# Altium PCB MAGI'sMicroSD.PcbDoc
Units mm, origin at the board's own origin, x right, y up, seen from the top; angles counter-clockwise.
Board outline 152.4 x 101.6 mm, 2 copper layers (Top Layer, Bottom Layer); 9 components, 17 nets, 72 pads, 7 vias.
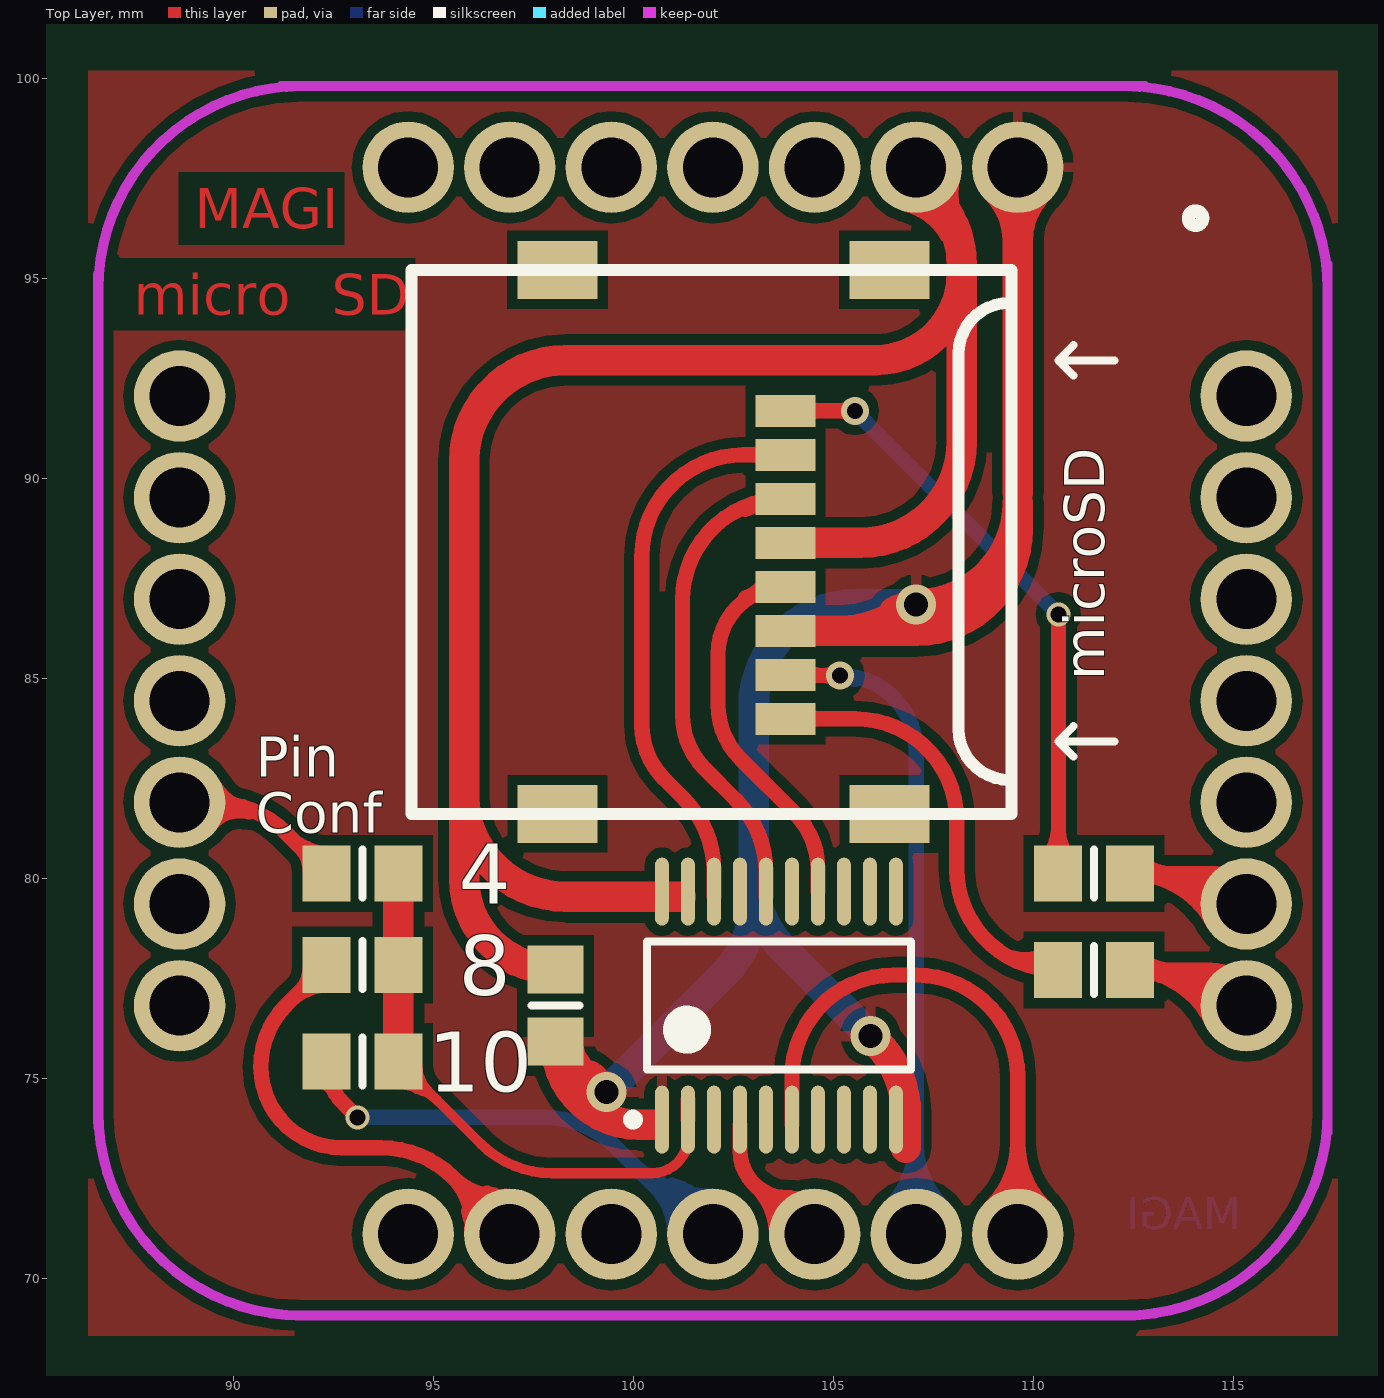
[diagram p0: Top Layer view]
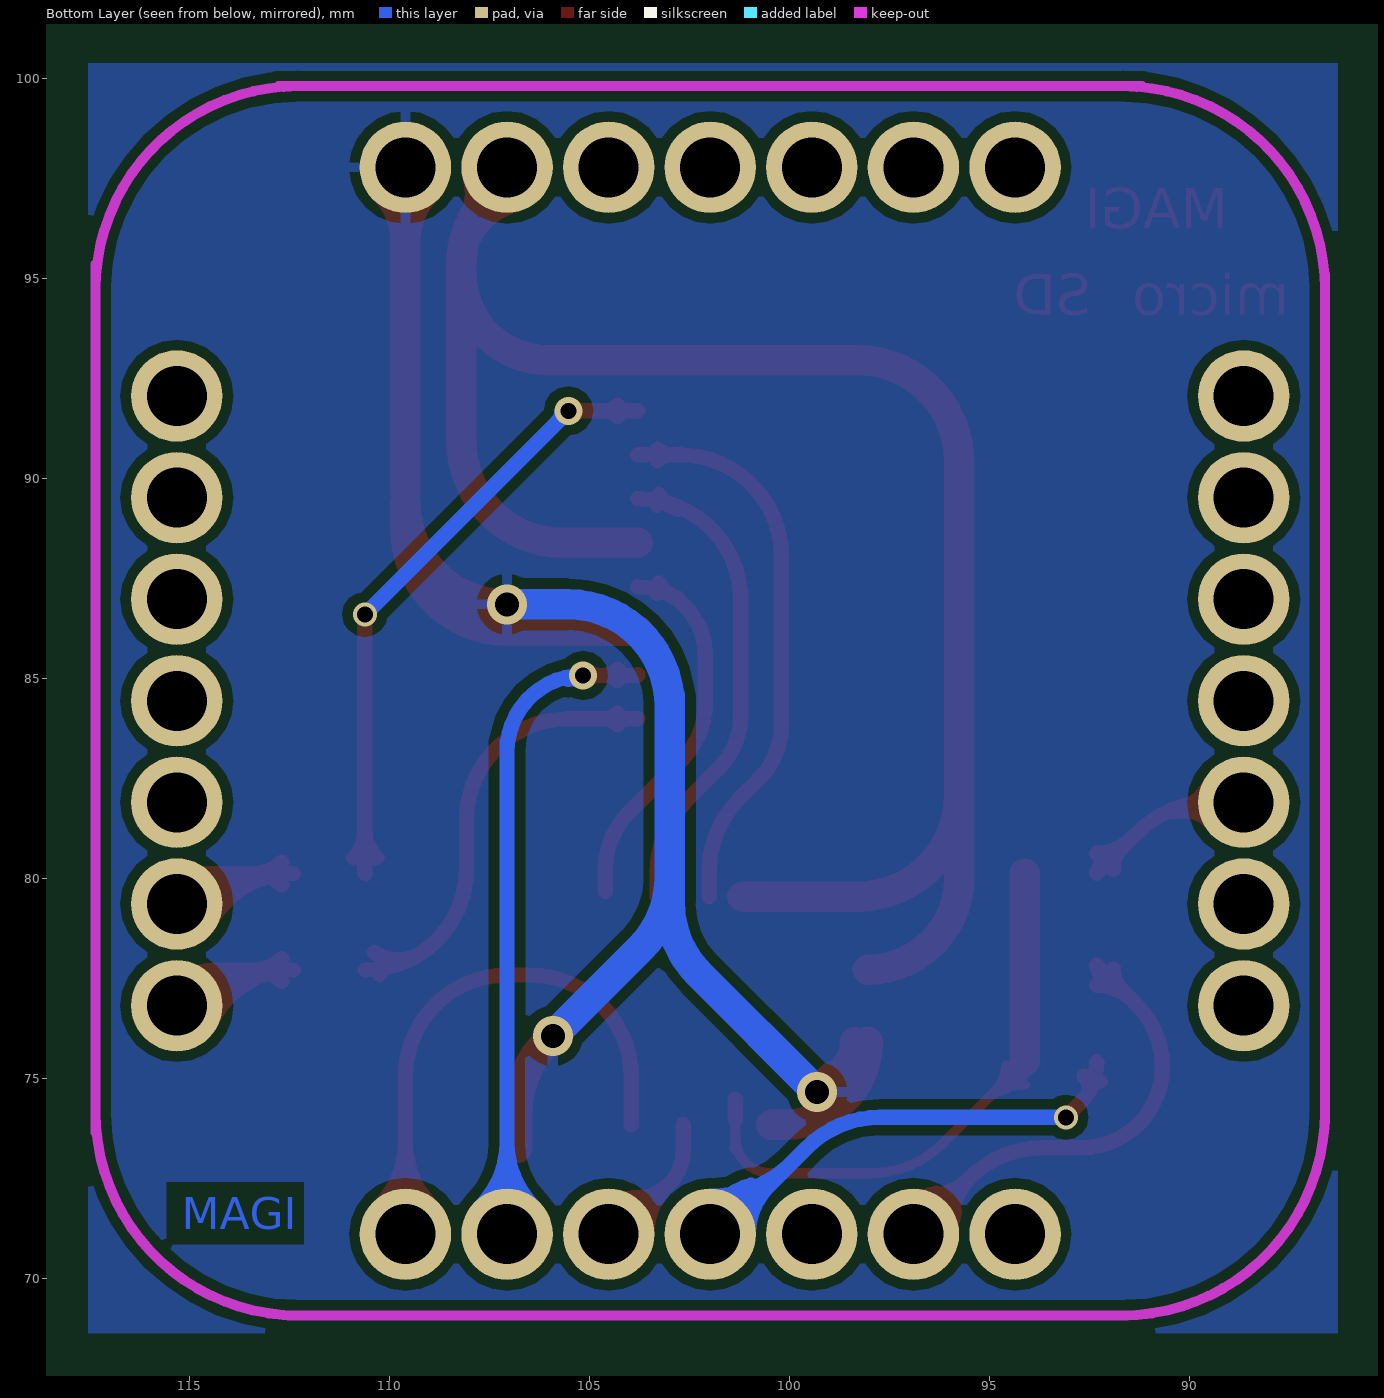
[diagram p1: Bottom Layer view, seen from below]

## Layer stack, top to bottom
Top Solder: solder mask 0.0102, Solder Resist, Dk 3.5
Top Layer: signal copper 0.0356
Dielectric 1: dielectric 0.32, FR-4, Dk 4.8
Bottom Layer: signal copper 0.0356
Bottom Solder: solder mask 0.0102, Solder Resist, Dk 3.5

## Board outline
25.4,25.4 177.8,25.4 177.8,127 25.4,127

## Design rules (kind name [scope] priority, off if disabled: settings)
Clearance [All] p1: gap=0.254
ComponentClearance [All] p1 off: gap=0.254 collisioncheckmode=3 verticalgap=0.254 showdistances=FALSE
PolygonConnect [All] p1: connectstyle=Relief reliefconductorwidth=0.254 reliefentries=4 polygonreliefangle="90 Angle" airgapwidth=0.254
RoutingVias [All] p1: holewidth=0.711 width=1.27 viastyle="Through Hole" minholewidth=0.711 minwidth=1.27 maxholewidth=0.711 maxwidth=1.27
SolderMaskExpansion [All] p1: expansion=0.102
Width [All] p1: maxlimit=2.54 minlimit=0.254 preferedwidth=0.762
28 further rules are at their usual default settings.

## Classes and differential pairs
component class MAGI'sMicroSD: C8 J1 J2 U1

## Components (designator, comment, footprint, x,y, rotation, side; value= is the part's Value field where it differs from the comment)
C8 "SANYO" 6-0805_N 98.044,76.835 r270 top
J1 "MAGI-M8" MAGI-M8 101.981,84.455 r0 top
J2 "MicroSD" MICROSD 101.346,85.979 r270 top
U1 "SN74LVC244A" SN74LVC244APWRG 103.632,76.835 r90 top
? "Comment" 6-0805_N 111.506,77.724 r0 top
? "Comment" 6-0805_N 111.506,80.137 r180 top
? "Comment" 6-0805_N 93.218,80.137 r0 top
? "Comment" 6-0805_N 93.218,77.851 r0 top
? "Comment" 6-0805_N 93.218,75.438 r0 top

## Footprints (in the part's own frame and the unit in brackets; to place one, negate y for a bottom-side part, rotate by r counter-clockwise, add the part's x,y. Pads: shape width x height; smd on the part's side, far side on the other; paste and mask are expansions set on the pad)
6-0805_N [mm] "Chip Resistor, Body 2.0x1.2mm, IPC Medium Density"
  rect 1.2x1.4 smd: 1(-0.9,0) 2(0.9,0)
  silkscreen extent 0,-0.6 0,0.6, body extent -1.07,-0.7 1.07,0.7, height 0.7
MAGI-M8 [mil]
  round 90 hole 59.06: 1(300,525) 2(200,525) 3(100,525) 4(0,525) 5(-100,525) 6(-200,525) 7(-300,525) 8(-525,300) 9(-525,200) 10(-525,100) 11(-525,0) 12(-525,-100) 13(-525,-200) 14(-525,-300) 15(-300,-525) 16(-200,-525) 17(-100,-525) 18(0,-525) 19(100,-525) 20(200,-525) 21(300,-525) 22(525,-300) 23(525,-200) 24(525,-100) 25(525,0) 26(525,100) 27(525,200) 28(525,300)
  Keep-Out Layer lines w10: -605,-415 -605,290 -605,420 ; -605,-405 ccw(c-405,-405) -405,-605 ; -605,405 cw(c-405,405) -405,605 ; -425,605 425,605 ; -410,-605 415,-605 ; 405,-605 ccw(c405,-405) 605,-405 ; 405,605 cw(c405,405) 605,405 ; 605,-425 605,430
MICROSD [mm]
  rect 1.45x2 smd: 0(-9.25,5.05) 0(-9.25,-3.25) 0(4.35,5.05) 0(4.35,-3.25)
  rect 0.8x1.5 smd: 1(-5.725,2.45) 2(-4.625,2.45) 3(-3.525,2.45) 4(-2.425,2.45) 5(-1.325,2.45) 6(-0.225,2.45) 7(0.875,2.45) 8(1.975,2.45)
  silkscreen extent -9.25,-6.9 4.35,8.1
SN74LVC244APWRG [mm]
  oval 1.7x0.35 smd: 1(-2.85,2.925) 2(-2.85,2.275) 3(-2.85,1.625) 4(-2.85,0.975) 5(-2.85,0.325) 6(-2.85,-0.325) 7(-2.85,-0.975) 8(-2.85,-1.625) 9(-2.85,-2.275) 10(-2.85,-2.925) 11(2.85,-2.925) 12(2.85,-2.275) 13(2.85,-1.625) 14(2.85,-0.975) 15(2.85,-0.325) 16(2.85,0.325) 17(2.85,0.975) 18(2.85,1.625) 19(2.85,2.275) 20(2.85,2.925)
  silkscreen extent -2.97,-3.3 1.6,3.77, body extent -2.25,-3.3 2.25,3.3, height 1.2

## Part data
C8: library part CAP_1, "Capacitor"
U1: library part 74LVC244

## Via types
v1: diameter 1, hole 0.6, Top Layer to Bottom Layer, 3 vias
v2: diameter 0.6, hole 0.4, Top Layer to Bottom Layer, 2 vias
v3: diameter 0.7, hole 0.4, Top Layer to Bottom Layer, 2 vias

## Nets (pads, with @x,y where several pads share a name; then routed paths per layer and width w, separated by ;. In a path a pad name is that pad's centre, name@x,y a point inside that pad or via, vN(x,y) a via of type N, cw(c..) or ccw(c..) an arc to the next point about the centre after c; other vN are vias at no path point)
4: ?.1@92.318,80.137 J1.12 | length 14.5
  Top Layer w0.381: J1.12 89.488,81.915 cw(c89.488,79.375) 91.284,81.171 ?.1@92.318,80.137 ; 91.694,80.814 cw(c91.474,79.992) ?.1@92.291,80.229 ; 90.393,81.672 cw(c90.782,83.122) 89.475,82.384 ccw(c90.782,83.122) 90.393,81.672 ; 90.393,81.672 ccw(c90.15,80.763) 89.402,81.336 cw(c90.15,80.763) 90.393,81.672 ; J1.12@89.1,81.567 cw(c89.66,81.138) 89.843,81.82 ccw(c89.66,81.138) J1.12@89.1,81.567 ; 91.448,81.007 ccw(c92.318,81.877) 92.318,80.647 cw(c92.318,81.877) 91.448,81.007 ; 91.69,80.765 cw(c91.161,80.237) 91.909,80.237 ccw(c91.161,80.237) 91.69,80.765
8: ?.1@92.318,77.851 J1.16 | length 27.2
  Top Layer w0.381: 91.694,77.174 ccw(c91.474,77.996) ?.1@92.291,77.759 ; ?.1@92.318,77.851 91.314,76.847 ccw(c92.851,75.311) 90.678,75.311 ccw(c92.71,75.311) 92.71,73.279 93.69,73.279 cw(c93.69,70.739) 95.486,72.535 ; 95.878,71.689 ccw(c97.357,71.926) J1.16@96.62,70.623 ; 96.332,72.143 cw(c96.095,70.664) J1.16@97.398,71.401 ; J1.16 95.486,72.535 ; 95.486,72.535 cw(c94.336,71.385) 95.954,71.218 ccw(c94.336,71.385) 95.486,72.535 ; 95.486,72.535 ccw(c96.636,73.685) 96.803,72.067 cw(c96.636,73.685) 95.486,72.535 ; 96.052,71.969 cw(c95.362,71.279) 96.333,71.179 ccw(c95.362,71.279) 96.052,71.969 ; 96.052,71.969 ccw(c96.742,72.659) 96.842,71.688 cw(c96.742,72.659) 96.052,71.969 ; 91.448,76.981 cw(c92.318,76.111) 92.318,77.342 ccw(c92.318,76.111) 91.448,76.981 ; 91.69,77.223 ccw(c91.161,77.751) 91.909,77.751 cw(c91.161,77.751) 91.69,77.223
10: ?.1@92.318,75.438 J1.18 | length 25.5
  Top Layer w0.381: ?.1@92.318,75.438 ccw(c93.824,75.438) 92.759,74.373 v2(93.091,74.041) ; 92.531,74.641 cw(c92.988,74.764) 92.629,75.072 ccw(c92.988,74.764) 92.531,74.641 ; 92.531,74.641 ccw(c92.129,74.534) 92.224,74.939 cw(c92.129,74.534) 92.531,74.641
  Bottom Layer w0.381: v2(93.091,74.041) 97.754,74.041 cw(c97.754,71.501) 99.55,73.297 101.547,71.3 ccw(c101.981,71.733) J1.18 ; 100.959,72.346 cw(c100.514,70.684) J1.18@102.164,71.174 ; 99.921,72.926 ccw(c101.981,74.985) 101.981,72.072 cw(c101.981,74.985) 99.921,72.926 ; 100.535,72.312 cw(c99.342,71.12) 101.028,71.12 ccw(c99.342,71.12) 100.535,72.312 ; 100.572,72.275 ccw(c101.981,73.684) 101.981,71.691 cw(c101.981,73.684) 100.572,72.275
CS: J2.2 U1.18 | length 16.5
  Top Layer w0.381: U1.18@102.007,79.558 102.007,80.202 ccw(c99.467,80.202) 101.263,81.998 100.767,82.494 cw(c102.13,83.856) 100.203,83.856 100.203,88.064 cw(c102.743,88.064) 102.743,90.604 J2.2 ; 102.94,90.604 cw(c102.94,90.098) J2.2@103.298,90.456 ; 102.94,90.604 ccw(c102.94,91.11) J2.2@103.298,90.752 ; 102.94,90.604 cw(c102.94,90.098) J2.2@103.298,90.456 ; 102.94,90.604 ccw(c102.94,91.11) J2.2@103.298,90.752 ; 102.94,90.604 ccw(c102.94,91.11) J2.2@103.298,90.752 ; 102.94,90.604 cw(c102.94,90.098) J2.2@103.298,90.456
DI: J2.3 U1.16 | length 15.1
  Top Layer w0.381: U1.16@103.307,79.558 103.307,80.172 ccw(c100.767,80.172) 102.563,81.968 101.783,82.748 cw(c103.146,84.11) 101.219,84.11 101.219,86.964 cw(c103.759,86.964) 103.759,89.504 J2.3 ; 102.79,89.244 ccw(c102.587,90) J2.3@103.265,89.609 ; 102.79,89.244 ccw(c102.587,90) J2.3@103.265,89.609 ; 102.79,89.244 ccw(c102.587,90) J2.3@103.265,89.609 ; 102.978,89.322 cw(c103.157,89.144) J2.3@103.315,89.341 ; 102.978,89.322 cw(c103.157,89.144) J2.3@103.315,89.341 ; 102.978,89.322 cw(c103.157,89.144) J2.3@103.315,89.341
GND: C8.2 J1.1 J2.6 U1.1 U1.10 | length 75.6
  Top Layer w0.762: C8.2 ccw(c100.121,75.935) 100.121,73.858 100.457,73.858 ; J2.6 107.061,86.204 ccw(c107.061,88.744) 109.601,88.744 109.601,89.408 cw(c107.061,89.408) v1(107.061,86.868) ; v1(105.918,76.073) 106.063,75.928 cw(c104.267,74.132) 106.557,75.231 cw(c104.267,74.132) 106.807,74.132 106.807,73.279 ; 109.601,89.662 J1.1 ; C8.2@98.079,75.867 ccw(c100.015,76.862) v1@99.35,74.789 ; C8.2@98.079,75.867 ccw(c100.015,76.862) v1@99.35,74.789 ; C8.2@98.079,75.867 ccw(c100.015,76.862) v1@99.35,74.789 ; 98.248,75.174 cw(c99.077,75.396) C8.2@98.334,75.825 ; 98.248,75.174 cw(c99.077,75.396) C8.2@98.334,75.825 ; 98.248,75.174 cw(c99.077,75.396) C8.2@98.334,75.825 ; C8.2@98.363,75.924 ccw(c99.211,75.883) 98.582,75.312 ; C8.2@98.363,75.924 ccw(c99.211,75.883) 98.582,75.312 ; C8.2@98.363,75.924 ccw(c99.211,75.883) 98.582,75.312 ; 98.901,75.078 cw(c98.533,74.507) v1@99.198,74.651 ; 98.901,75.078 cw(c98.533,74.507) v1@99.198,74.651 ; 98.901,75.078 cw(c98.533,74.507) v1@99.198,74.651 ; 105.171,86.204 ccw(c105.171,88.758) v1@106.977,86.952 ; 105.171,86.204 ccw(c105.171,88.758) v1@106.977,86.952 ; 105.171,86.204 ccw(c105.171,88.758) v1@106.977,86.952 ; 106.514,86.685 cw(c106.854,86.096) v1@107.03,86.753 ; 106.514,86.685 cw(c106.854,86.096) v1@107.03,86.753 ; 106.514,86.685 cw(c106.854,86.096) v1@107.03,86.753 ; J1.1@109.062,97.251 cw(c107.761,95.95) 109.601,95.95 ; J1.1@109.062,97.251 cw(c107.761,95.95) 109.601,95.95 ; J1.1@109.062,97.251 cw(c107.761,95.95) 109.601,95.95 ; 109.601,95.95 cw(c111.441,95.95) J1.1@110.14,97.251 ; 109.601,95.95 cw(c111.441,95.95) J1.1@110.14,97.251 ; 109.601,95.95 cw(c111.441,95.95) J1.1@110.14,97.251
  Bottom Layer w0.762: v1(99.314,74.676) 102.253,77.615 ccw(c100.457,79.411) 102.997,79.411 102.997,80.046 ; 102.997,84.328 cw(c105.537,84.328) 105.537,86.868 v1(107.061,86.868) ; 102.997,84.582 102.997,80.046 ; v1(105.918,76.073) 103.741,78.25 cw(c105.537,80.046) 102.997,80.046
MISO: J1.20 J2.7 | length 40
  Top Layer w0.381: J2.7 103.796,85.09 v3(105.156,85.09) ; J2.7@104.294,84.956 cw(c104.618,84.632) 104.618,85.09 ; J2.7@104.294,84.956 cw(c104.618,84.632) 104.618,85.09 ; J2.7@104.294,84.956 cw(c104.618,84.632) 104.618,85.09 ; J2.7@104.294,85.252 ccw(c104.686,85.644) 104.686,85.09 ; J2.7@104.294,85.252 ccw(c104.686,85.644) 104.686,85.09 ; J2.7@104.294,85.252 ccw(c104.686,85.644) 104.686,85.09 ; 104.771,85.09 cw(c104.771,84.705) v3@105.043,84.977 ; 104.771,85.09 ccw(c104.771,85.475) v3@105.043,85.203 ; 104.771,85.09 cw(c104.771,84.705) v3@105.043,84.977 ; 104.771,85.09 ccw(c104.771,85.475) v3@105.043,85.203 ; 104.771,85.09 ccw(c104.771,85.475) v3@105.043,85.203 ; 104.771,85.09 cw(c104.771,84.705) v3@105.043,84.977
  Bottom Layer w0.381: v3(105.156,85.09) cw(c105.156,83.185) 107.061,83.185 ; J1.20 107.061,83.439 ; v3@105.236,84.952 cw(c105.428,84.618) 105.528,84.99 ; v3@105.236,84.952 cw(c105.428,84.618) 105.528,84.99 ; v3@105.236,84.952 cw(c105.428,84.618) 105.528,84.99 ; v3@105.294,85.17 ccw(c105.628,85.362) 105.528,84.99 ; v3@105.294,85.17 ccw(c105.628,85.362) 105.528,84.99 ; v3@105.294,85.17 ccw(c105.628,85.362) 105.528,84.99 ; J1.20@106.387,71.794 ccw(c104.761,73.42) 107.061,73.42 ; J1.20@106.387,71.794 ccw(c104.761,73.42) 107.061,73.42 ; J1.20@106.387,71.794 ccw(c104.761,73.42) 107.061,73.42 ; J1.20@106.657,71.524 ccw(c105.681,72.5) 107.061,72.5 ; J1.20@106.657,71.524 ccw(c105.681,72.5) 107.061,72.5 ; J1.20@106.657,71.524 ccw(c105.681,72.5) 107.061,72.5 ; 107.061,72.5 ccw(c108.441,72.5) J1.20@107.465,71.524 ; 107.061,72.5 ccw(c108.441,72.5) J1.20@107.465,71.524 ; 107.061,72.5 ccw(c108.441,72.5) J1.20@107.465,71.524 ; 107.061,73.42 ccw(c109.361,73.42) J1.20@107.735,71.794 ; 107.061,73.42 ccw(c109.361,73.42) J1.20@107.735,71.794 ; 107.061,73.42 ccw(c109.361,73.42) J1.20@107.735,71.794
MOSI: J1.19 U1.4 | length 18.8
  Top Layer w0.381: U1.4@102.657,73.858 102.657,73.211 ccw(c103.818,73.211) 102.997,72.39 ; J1.19 cw(c104.521,71.733) 104.087,71.3 102.997,72.39 ; 102.997,72.39 ccw(c103.943,73.336) J1.19@104.28,72.042 ; 102.997,72.39 ccw(c103.943,73.336) J1.19@104.28,72.042 ; 102.997,72.39 ccw(c103.943,73.336) J1.19@104.28,72.042 ; 103.075,72.312 cw(c101.882,71.12) J1.19@103.569,71.12 ; 103.075,72.312 cw(c101.882,71.12) J1.19@103.569,71.12 ; 103.075,72.312 cw(c101.882,71.12) J1.19@103.569,71.12 ; 103.467,71.92 ccw(c104.137,72.59) J1.19@104.377,71.673 ; 103.467,71.92 ccw(c104.137,72.59) J1.19@104.377,71.673 ; 103.467,71.92 ccw(c104.137,72.59) J1.19@104.377,71.673 ; 103.686,72.045 cw(c103.674,70.284) J1.19@104.928,71.521 ; 103.686,72.045 cw(c103.674,70.284) J1.19@104.928,71.521 ; 103.686,72.045 cw(c103.674,70.284) J1.19@104.928,71.521
NewNet: 
SCK: J1.21 U1.6 | length 31
  Top Layer w0.381: U1.6@103.957,73.858 103.957,75.057 cw(c106.497,75.057) 106.497,77.597 107.061,77.597 cw(c107.061,75.057) 109.601,75.057 J1.21 ; J1.21@108.927,71.794 ccw(c107.301,73.42) 109.601,73.42 ; J1.21@108.927,71.794 ccw(c107.301,73.42) 109.601,73.42 ; J1.21@108.927,71.794 ccw(c107.301,73.42) 109.601,73.42 ; J1.21@109.197,71.524 ccw(c108.221,72.5) 109.601,72.5 ; J1.21@109.197,71.524 ccw(c108.221,72.5) 109.601,72.5 ; J1.21@109.197,71.524 ccw(c108.221,72.5) 109.601,72.5 ; 109.601,72.5 ccw(c110.981,72.5) J1.21@110.005,71.524 ; 109.601,72.5 ccw(c110.981,72.5) J1.21@110.005,71.524 ; 109.601,72.5 ccw(c110.981,72.5) J1.21@110.005,71.524 ; 109.601,73.42 ccw(c111.901,73.42) J1.21@110.275,71.794 ; 109.601,73.42 ccw(c111.901,73.42) J1.21@110.275,71.794 ; 109.601,73.42 ccw(c111.901,73.42) J1.21@110.275,71.794
SCLK: J2.5 U1.14 | length 12.3
  Top Layer w0.381: J2.5 ccw(c103.796,85.616) 102.108,85.616 102.108,84.364 ccw(c104.035,84.364) 102.672,83.002 104.013,81.661 cw(c102.579,80.227) 104.607,80.227 U1.14 ; 102.8,87.037 ccw(c102.609,87.752) J2.5@103.261,87.403 ; 102.8,87.037 ccw(c102.609,87.752) J2.5@103.261,87.403 ; 102.8,87.037 ccw(c102.609,87.752) J2.5@103.261,87.403 ; 102.99,87.114 cw(c103.167,86.948) J2.5@103.317,87.139 ; 102.99,87.114 cw(c103.167,86.948) J2.5@103.317,87.139 ; 102.99,87.114 cw(c103.167,86.948) J2.5@103.317,87.139
SS: ?.2@94.118,75.438 ?.2@94.118,77.851 ?.2@94.118,80.137 U1.2 | length 20.8
  Top Layer w0.254: ?.2@94.084,75.329 ccw(c94.945,75.569) 94.714,74.705 ; ?.2@94.118,75.438 96.168,73.388 ccw(c97.964,75.184) 97.964,72.644 100.457,72.644 ccw(c100.457,73.544) 101.357,73.544 U1.2 ; 101.263,73.15 ccw(c101.143,73.27) U1.2@101.31,73.301 ; ?.2@94.118,74.865 cw(c94.118,73.482) 95.096,74.46 ccw(c94.118,73.482) ?.2@94.118,74.865 ; ?.2@94.118,75.119 cw(c94.118,74.349) 94.663,74.893 ccw(c94.118,74.349) ?.2@94.118,75.119 ; ?.2@94.591,75.338 ccw(c95.491,75.338) 94.855,74.701 cw(c95.491,75.338) ?.2@94.591,75.338 ; 101.231,73.073 cw(c101.542,72.989) 101.381,73.268 ccw(c101.542,72.989) 101.231,73.073
  Top Layer w0.381: U1.2 U1.2@101.357,74.492
  Top Layer w0.762: ?.2@94.118,75.438 94.118,77.851 ?.2@94.118,80.137
T1: ?.1@112.406,80.137 J1.23 | length 12.7
  Top Layer w0.381: ?.1@112.696,79.847 cw(c113.395,79.148) 113.395,80.137 cw(c113.395,81.126) ?.1@112.696,80.427 ; 113.053,80.137 cw(c113.053,78.121) J1.23@114.816,79.098 ; 113.699,80.137 cw(c113.699,78.479) J1.23@115.149,79.283 ; 114.346,80.137 cw(c114.346,78.838) J1.23@115.483,79.467 ; J1.23@114.483,78.913 ccw(c112.406,77.763) 112.406,80.137 114.554,80.137 cw(c114.554,79.375) J1.23
T2: ?.2@112.406,77.724 J1.22 | length 13.3
  Top Layer w0.381: ?.2@112.696,77.434 cw(c113.395,76.735) 113.395,77.724 cw(c113.395,78.713) ?.2@112.696,78.014 ; 113.008,77.724 cw(c113.008,75.742) J1.22@114.8,76.59 ; 113.61,77.724 cw(c113.61,76.027) J1.22@115.144,76.753 ; 114.212,77.724 cw(c114.212,76.312) J1.22@115.488,76.917 ; J1.22@114.455,76.427 ccw(c112.406,75.457) 112.406,77.724 114.427,77.724 cw(c114.427,76.835) J1.22
T10: ?.2@110.606,80.137 J2.1 | length 19
  Top Layer w0.381: J2.1 v3(105.527,91.704) ; J2.1@104.294,91.556 cw(c104.652,91.198) 104.652,91.704 cw(c104.652,92.21) J2.1@104.294,91.852 ; v3@105.414,91.591 ccw(c105.142,91.319) 105.142,91.704 ccw(c105.142,92.089) v3@105.414,91.817 ; ?.2@110.316,80.527 ccw(c109.591,81.252) 110.617,81.252 ; ?.2@110.606,80.137 110.617,80.148 v2(110.617,86.614) ; 110.617,81.199 ccw(c111.568,81.199) ?.2@110.896,80.527
  Bottom Layer w0.381: v3@105.527,91.545 cw(c105.527,91.159) 105.799,91.432 cw(c106.072,91.704) v3@105.686,91.704 ; v3(105.527,91.704) v2(110.617,86.614)
T20: ?.1@110.606,77.724 J2.8 | length 13.1
  Top Layer w0.381: J2.8 105.537,84.004 cw(c105.537,81.464) 108.077,81.464 108.077,80.253 ccw(c110.606,80.253) ?.1@110.606,77.724 ; J2.8@104.294,83.856 cw(c104.652,83.498) 104.652,84.004 cw(c104.652,84.51) J2.8@104.294,84.152 ; 109.503,78.02 ccw(c109.781,79.057) ?.1@110.378,78.164 ; 109.851,77.926 cw(c109.681,77.29) ?.1@110.251,77.619
VCC: C8.1 J1.2 J2.4 U1.19 U1.20 | length 57.7
  Top Layer w0.762: 95.758,81.844 95.758,90.434 cw(c98.298,90.434) 98.298,92.974 106.044,92.974 ccw(c106.044,95.134) 108.204,95.134 ; C8.1 cw(c98.044,80.021) 95.758,80.021 95.758,82.098 ccw(c98.298,82.098) 98.298,79.558 100.707,79.558 101.181,79.558 ; J2.4 105.664,88.404 ccw(c105.664,90.944) 108.204,90.944 108.204,95.134 ; J1.2 J1.2@107.46,97.391 ; J1.2@107.46,97.137 cw(c105.664,95.341) 108.204,95.341 108.204,95.134 ; J1.2@106.864,97.054 cw(c106.371,95.214) 108.02,96.167 ; J1.2@106.864,97.054 cw(c106.371,95.214) 108.02,96.167 ; J1.2@106.864,97.054 cw(c106.371,95.214) 108.02,96.167 ; J1.2@107.797,97.593 ccw(c109.511,97.133) 107.974,96.246 ; J1.2@107.797,97.593 ccw(c109.511,97.133) 107.974,96.246 ; J1.2@107.797,97.593 ccw(c109.511,97.133) 107.974,96.246
pads on no net: J1.3 J1.4 J1.5 J1.6 J1.7 J1.8 J1.9 J1.10 J1.11 J1.13 J1.14 J1.15 J1.17 J1.24 J1.25 J1.26 J1.27 J1.28 J2.0 U1.3 U1.5 U1.7 U1.8 U1.9 U1.11 U1.12 U1.13 U1.15 U1.17

## Polygon pours and split planes (outlines as drawn)
GND on Top Layer "Bottom Layer-No Net" (solid, pour order 2): 86.36,100.203 117.602,100.203 117.602,68.707 117.602,68.58 86.36,68.58
GND on Bottom Layer "Bottom Layer-No Net" (solid, pour order 4): 86.293,100.39 117.535,100.39 117.535,68.64 117.408,68.64 86.293,68.64

## Other copper
Top Layer:
  text "MAGI" at 89.027,96.266 h1
  text "micro" at 87.503,94.107 h1.02
  text "SD" at 92.456,94.107 h1.02
Bottom Layer:
  text "MAGI" at 115.189,71.247 h0.8

## Silkscreen, mask and mechanical layers (free items; w line width, h text height)
Top Overlay:
  circle w0.33: c114.046,96.52 r0.18
  lines w0.2: 110.998,83.058 110.617,83.439 ; 110.998,83.82 110.617,83.439 ; 110.998,92.583 110.617,92.964 ; 110.998,93.345 110.617,92.964 ; 112.014,83.439 110.617,83.439 ; 112.014,92.964 110.617,92.964
  text "microSD" at 111.76,84.963 h1 r90
  text "Pin" at 90.551,82.55 h1
  text "Conf" at 90.551,81.153 h1
  text "4" at 95.631,79.375 h1.5
  text "8" at 95.631,77.089 h1.5
  text "10" at 94.869,74.676 h1.5